# EAGLE board controller (tugas nanang) (EAGLE 7.5.0)
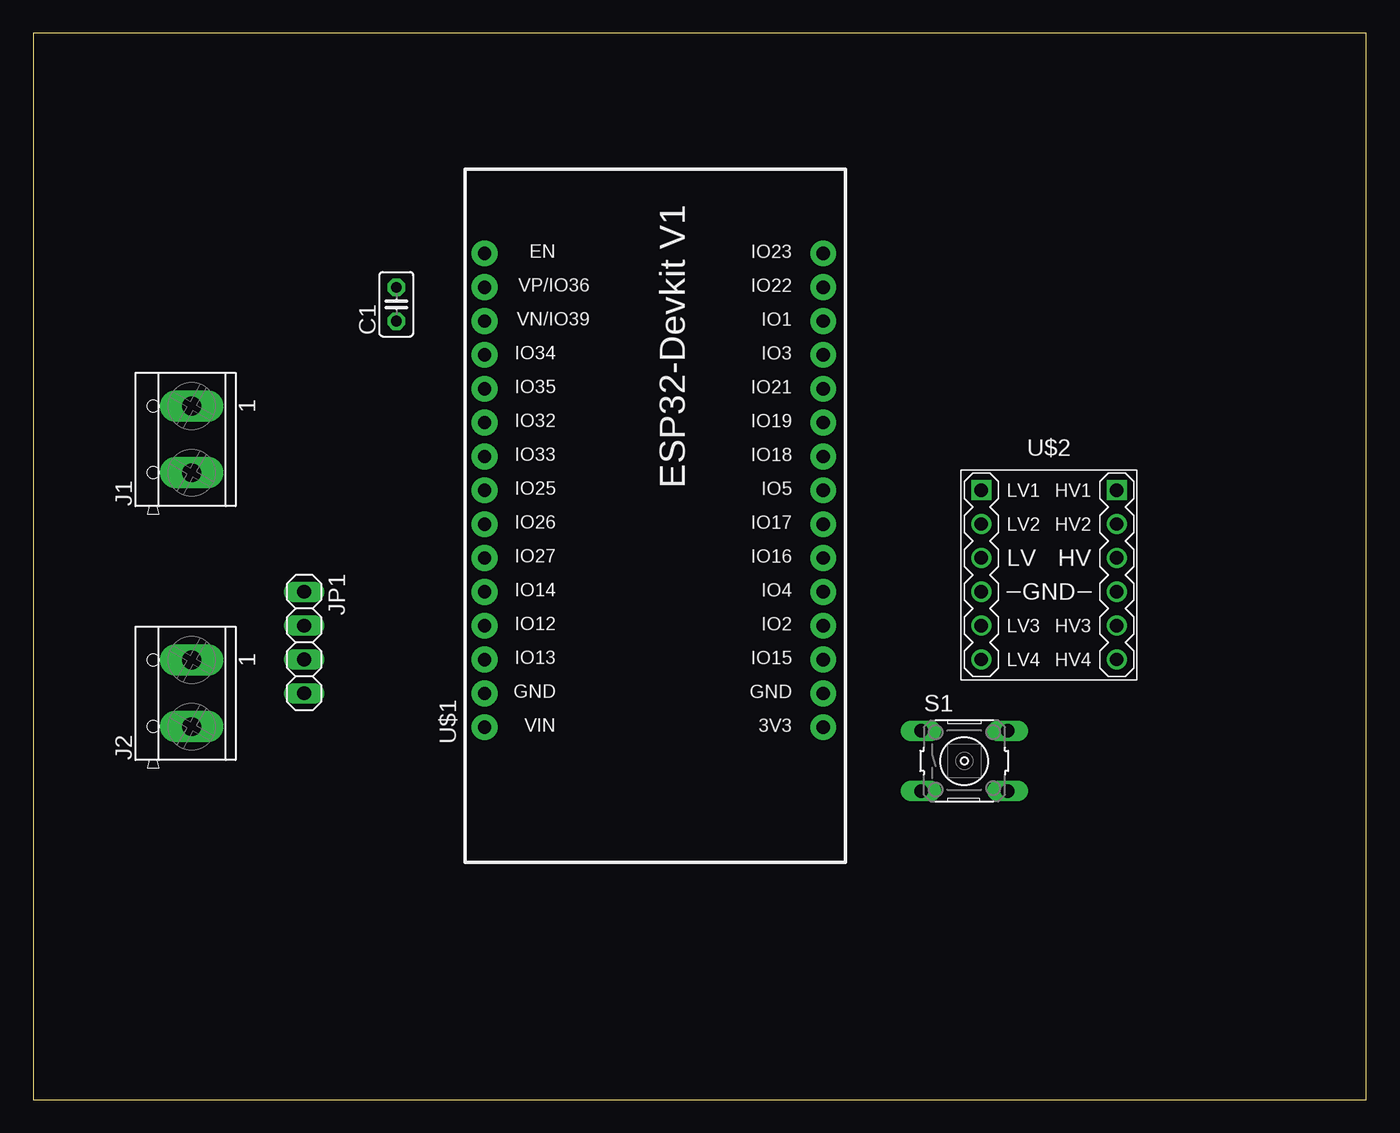
[diagram p0: board, top side]
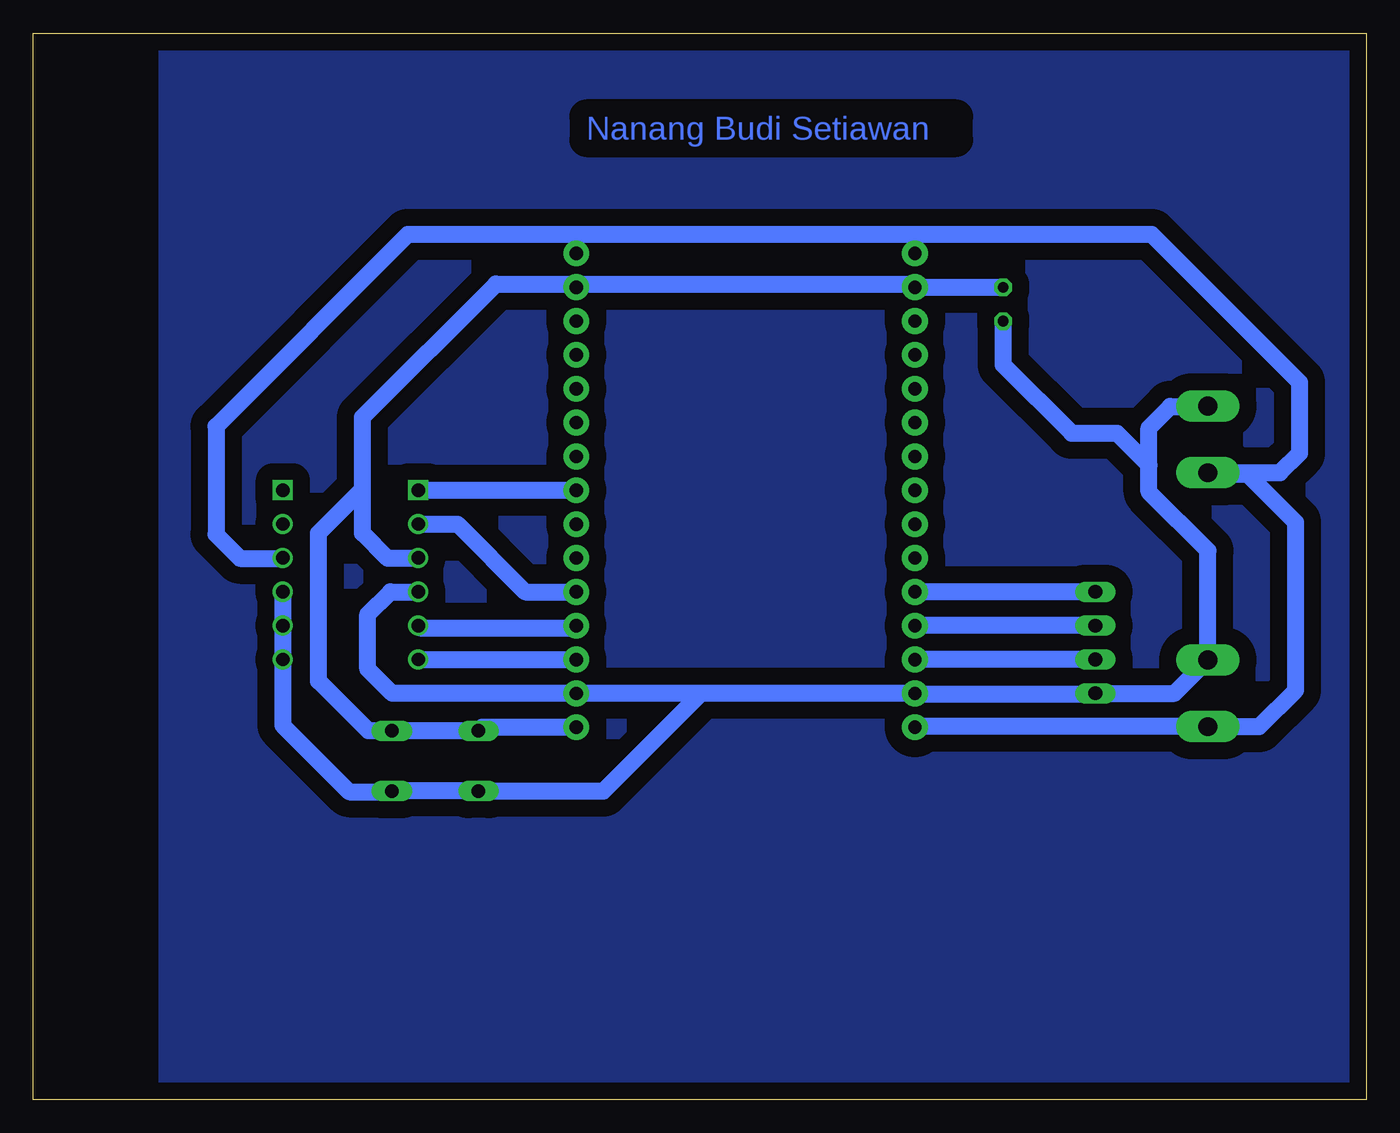
[diagram p1: board, bottom side, seen from below]

Size 100 x 80 mm. Coordinates in mm from the lower left corner, seen from the top.
Outline: 0,0 100,0 100,80 0,80 0,0
Copper layers (1*16): Top 0.035mm / dielectric 1.5mm / Bottom 0.035mm
Design rules "default": minimum track width 10mil, minimum drill 24mil, track to track 8mil, track to pad 8mil, pad to pad 8mil, via to via 8mil, smd to smd 8mil, copper to edge 40mil, drill to drill 8mil, minimum pad ring 10mil, minimum via ring 8mil, stop-mask expansion 4mil, vias tented up to drill 0mil, thermal gap 10mil

## Footprints (pad centres in the part's own frame; a part is rotated, then mirrored left to right if it is on the bottom)
C025-025X050 = drill 0.813 octagon: 1 -1.27,0; 2 1.27,0
TERMINAL_BLOCK_2P_5 = drill 1.4 pad 2.38 long: 1 2.5,-0.45; 2 -2.5,-0.45
1X04 = drill 1.016 long: 1 -3.81,0; 2 -1.27,0; 3 1.27,0; 4 3.81,0
B3F-10XX = drill 1.016 long: 1 -3.251,2.261; 2 3.251,2.261; 3 -3.251,-2.261; 4 3.251,-2.261
ESP32-DEVKITV1 = drill 1 pad 1.93: 3V3 -16.52,-12.27; D1 13.96,-12.27; D2 -8.9,-12.27; D3 11.42,-12.27; D4 -6.36,-12.27; D5 1.26,-12.27; D12 -8.9,13.135; D13 -11.44,13.135; D14 -6.36,13.135; D15 -11.44,-12.27; D16 -3.82,-12.27; D17 -1.28,-12.27; D18 3.8,-12.27; D19 6.34,-12.27; D21 8.88,-12.27; D22 16.5,-12.27; D23 19.04,-12.27; D25 1.26,13.135; D26 -1.28,13.135; D27 -3.82,13.135; D32 6.34,13.135; D33 3.8,13.135; D34 11.42,13.135; D35 8.88,13.135; D36 16.5,13.135; D39 13.96,13.135; EN 19.04,13.135; GND@1 -13.98,13.135; GND@2 -13.98,-12.27; VIN -16.52,13.135
LEVEL-SHIFTER-4CH = drill 1 square: J1.1 -5.08,6.35; J2.1 5.08,6.35 | drill 1: J1.2 -5.08,3.81; J1.3 -5.08,1.27; J1.4 -5.08,-1.27; J1.5 -5.08,-3.81; J1.6 -5.08,-6.35; J2.2 5.08,3.81; J2.3 5.08,1.27; J2.4 5.08,-1.27; J2.5 5.08,-3.81; J2.6 5.08,-6.35

## Placement (x,y rotation side)
C1  [C025-025X050]  27.24,59.67 90 top
J1  CON_TERMINAL_BLOCK_02-5MM  [TERMINAL_BLOCK_2P_5]  11.43,49.53 90 top
J2  CON_TERMINAL_BLOCK_02-5MM  [TERMINAL_BLOCK_2P_5]  11.43,30.48 90 top
JP1  [1X04]  20.32,34.29 270 top
S1  [B3F-10XX]  69.85,25.4 0 top
U$1  ESP32DEVKITV1  [ESP32-DEVKITV1]  46.99,44.45 90 top
U$2  LEVEL-SHIFTER-4CH  [LEVEL-SHIFTER-4CH]  76.2,39.37 0 top

## Library data of the parts
C1 = rcl; SPICEPREFIX: C
J1 J2 = tblok
JP1 = pinhead
S1 = switch-omron; MPN: B3F-1000; OC_FARNELL: 176432; OC_NEWARK: 36M3542
U$1 = esp32-devkitv1
U$2 = diy-model

## Nets
GND: C1.1 J1.1 J2.1 JP1.4 S1.3 S1.4 U$1.GND@1 U$1.GND@2 U$2.J1.4 U$2.J2.4
HV: J1.2 J2.2 U$1.VIN U$2.J2.3
LV: C1.2 S1.1 S1.2 U$1.3V3 U$1.D36 U$2.J1.3
LV1: U$1.D5 U$2.J1.1
LV2: U$1.D4 U$2.J1.2
LV3: U$1.D2 U$2.J1.5
LV4: U$1.D15 U$2.J1.6
OUT1: JP1.1 U$1.D14
OUT2: JP1.2 U$1.D12
OUT3: JP1.3 U$1.D13

## Tracks (layer width: path | path; a pad name or v marks a point on that pad's centre or on a via)
GND
  Bottom 1.27: 16.3,47.6 16.3,45.6 11.88,41.18 J2.1 14.38,30.48 JP1.4 20.72,30.48 20.8,30.4 33.78,30.4 U$1.GND@1 49.9,30.47 | 16.3,47.6 16.3,50.4 14.7,52 11.91,52 J1.1 | 49.9,30.47 U$1.GND@2 73.07,30.47 74.9,32.3 74.9,36.4 73.2,38.1 U$2.J1.4 | 49.9,30.47 57.23,23.14 S1.3 S1.4 73.14,23.1 76.3,23.1 81.28,28.08 U$2.J2.4 | C1.1 27.24,55.14 22.1,50 18.7,50 16.3,47.6
HV
  Bottom 1.27: U$1.VIN 33.8,27.98 J2.2 8.02,27.98 5.3,30.7 5.3,43.3 8.9,46.9 11.75,46.9 J1.2 6.47,47.03 5,48.5 5,53.8 16.1,64.9 71.9,64.9 86.3,50.5 86.3,42.4 84.5,40.6 81.32,40.6 U$2.J2.3
LV
  Bottom 1.27: U$1.3V3 66.33,27.93 S1.1 S1.2 74.86,27.66 78.6,31.4 78.6,42.5 75.3,45.8 | U$2.J1.3 71.04,40.64 71,40.6 73.4,40.6 75.3,42.5 75.3,45.8 | 75.3,45.8 75.3,51.2 65.3,61.2 34.1,61.2 U$1.D36 C1.2
LV1
  Bottom 1.27: U$2.J1.1 U$1.D5
LV2
  Bottom 1.27: U$2.J1.2 68.18,43.18 63.1,38.1 U$1.D4
LV3
  Bottom 1.27: U$2.J1.5 71.12,35.52 71,35.4 59.41,35.4 U$1.D2
LV4
  Bottom 1.27: U$2.J1.6 U$1.D15
N$1
  pour Bottom (isolate 1.27): 0,80 90,80 90,0 0,0
OUT1
  Bottom 1.27: JP1.1 U$1.D14
OUT2
  Bottom 1.27: JP1.2 33.84,35.56 U$1.D12
OUT3
  Bottom 1.27: JP1.3 33.84,33.02 U$1.D13

## Text on the board
Bottom: Nanang Budi Setiawan